# Altium PCB UCN LV.PcbDoc
Units mm, origin at the board's own origin, x right, y up, seen from the top; angles counter-clockwise.
Board outline 13.5 x 27.6 mm, 2 copper layers (Top Layer, Bottom Layer), stack 1.6 mm thick; 28 components, 33 nets, 114 pads, 84 vias.
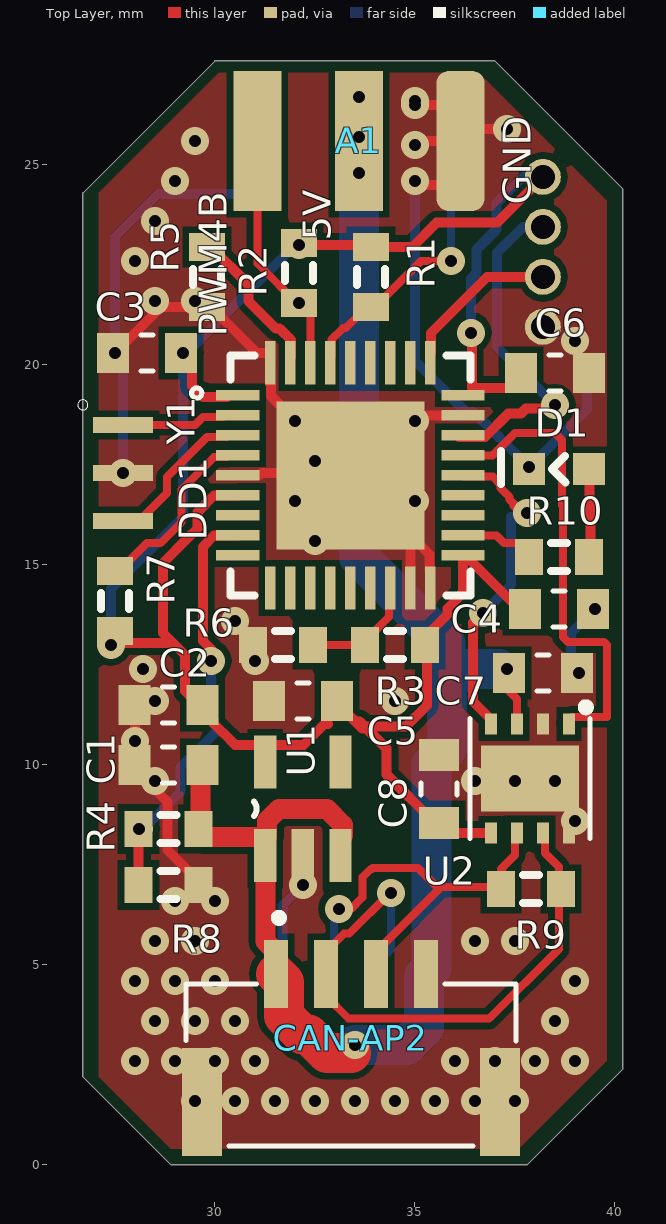
[diagram p0: Top Layer view]
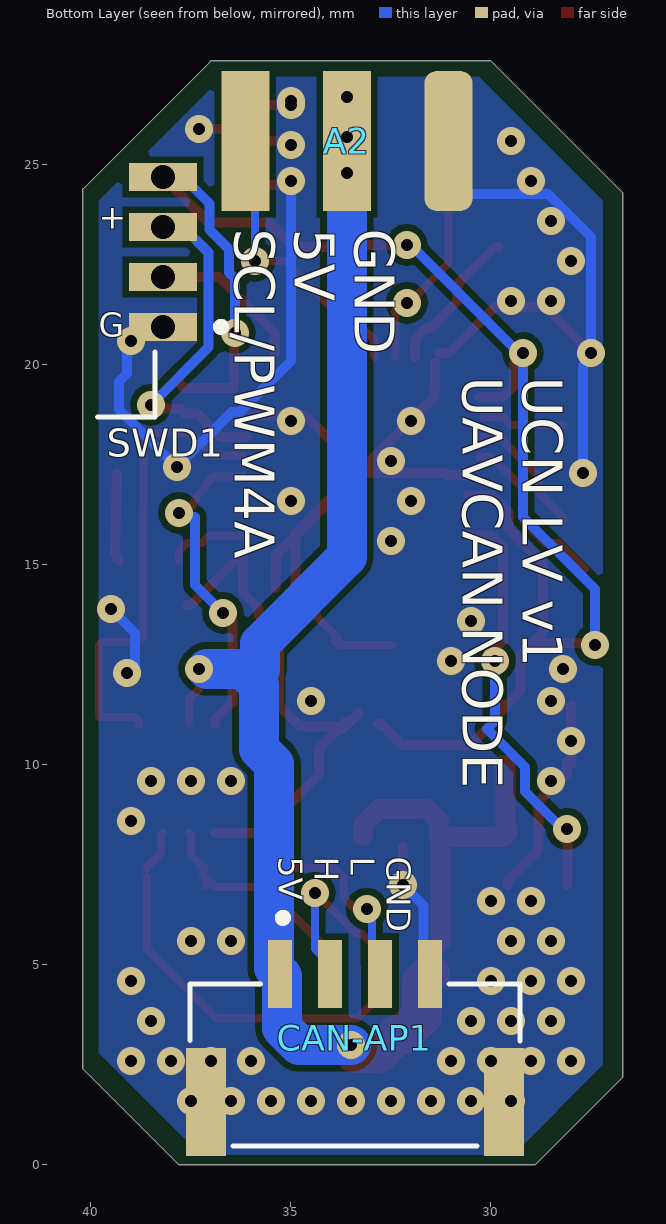
[diagram p1: Bottom Layer view, seen from below]
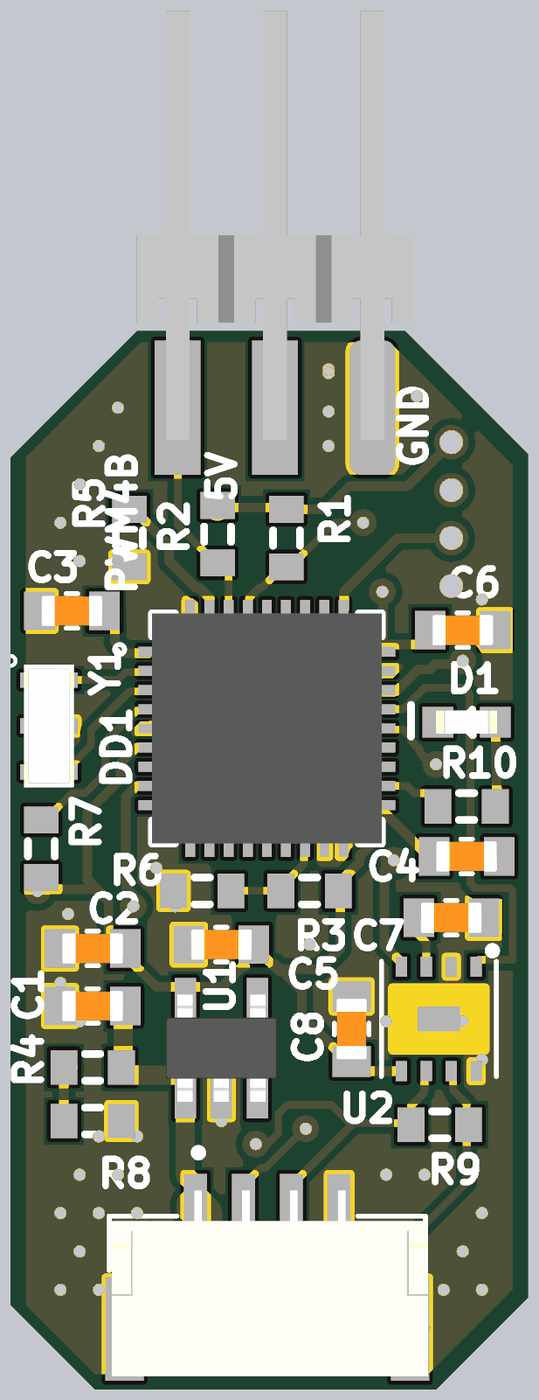
[diagram p2: 3D render of the assembled board from above, using the file's embedded part models]

## Layer stack, top to bottom
Top Solder: solder mask 0.0102, Solder Resist, Dk 3.5
Top Layer: signal copper 0.05
Dielectric 1: dielectric 1.5, FR-4, Dk 4.8
Bottom Layer: signal copper 0.05
Bottom Solder: solder mask 0.0102, Solder Resist, Dk 3.5

## Board outline
26.7,2.2 28.9,0 37.8,0 40.2,2.4 40.2,24.4 37,27.6 30,27.6 26.7,24.3

## Design rules (kind name [scope] priority, off if disabled: settings)
BoardOutlineClearance [All] p1: gap=0.25 ignorepadtopadclearanceinfootprint=FALSE
Clearance [All] p1: gap=0.17 ignorepadtopadclearanceinfootprint=FALSE
ComponentClearance [All] p1: gap=0.254 collisioncheckmode=3 verticalgap=2540 showdistances=FALSE
FanoutControl Fanout_SOIC [IsSOIC] p3: bgadir=Out bgaviamode=Closest fanoutstyle=Auto fanoutdirection=Alternating viagrid=0.025 // Fanout_SOIC (Default Rule)
FanoutControl Fanout_Small [(CompPinCount < 5)] p4: bgadir=Out bgaviamode=Closest fanoutstyle=Auto fanoutdirection=OutThenIn viagrid=0.025 // Fanout_Small (Default Rule)
FanoutControl Fanout_Default [All] p5: bgadir=In bgaviamode=Closest fanoutstyle=Auto fanoutdirection=Alternating viagrid=0.025 // Fanout_Default (Default Rule)
HoleSize [All] p1: absolutevalues=TRUE maxlimit=4.5 minlimit=0.3 maxpercent=80.000 minpercent=20.000
HoleToHoleClearance [All] p1: gap=0.4 allowstackedmicrovias=TRUE
MinimumSolderMaskSliver [All] p1: minsoldermaskwidth=0.15
PlaneClearance [All] p1: clearance=0.2
PlaneConnect [All] p1: planeconnectstyle=Relief reliefexpansion=0.5 reliefentries=4 reliefconductorwidth=0.2 reliefairgap=0.25
PolygonConnect PolygonConnect_1 [InNet('GND')] p1: connectstyle=Direct reliefconductorwidth=0.254 reliefentries=4 polygonreliefangle="90 Angle" airgapwidth=0.254
PolygonConnect [All] p2: connectstyle=Relief reliefconductorwidth=0.3 reliefentries=4 polygonreliefangle="90 Angle" airgapwidth=0.16
RoutingCorners [All] p1: cornerstyle=45-Degree minsetback=2.5 maxsetback=2.5
RoutingPriority [All] p1 off: routingpriority=0
RoutingVias [All] p1: holewidth=0.3 width=0.7 viastyle="Through Hole" minholewidth=0.3 minwidth=0.7 maxholewidth=0.8 maxwidth=1.2
SilkToSilkClearance [All] p1: silktosilkclearance=0
SilkToSolderMaskClearance [IsPad] p1: minsilkscreentomaskgap=0 clearancetoexposedcopper=TRUE
SolderMaskExpansion [All] p1: expansion=0.1
Width [All] p1: maxlimit=5 minlimit=0.17 preferedwidth=0.3
17 further rules are at their usual default settings.

## Classes and differential pairs
component class "UCN LV": A1 A2 CAN-AP1 CAN-AP2
component class STM32F103T8: C1 C2 C3 C4 C5 C6 C7 C8 D1 DD1 R1 R2 R3 R4 R5 R6 R7 R8 R9 R10 SWD1 U1 U2 Y1

## Components (designator, comment, footprint, x,y, rotation, side; value= is the part's Value field where it differs from the comment)
A1 "A" "HDR Side 3 pin" 33.6,25.6 r180 top
A2 "A" "HDR Side 3 pin" 33.6,25.6 r0 bottom
C1 "GX035C104MAT2-500" *CAPC1608X90 28.84,10 r180 top value=0.1u
C2 "GX035C104MAT2-500" *CAPC1608X90 28.84,11.5 r180 top value=0.1u
C3 "GX035C104MAT2-500" *CAPC1608X90 28.3,20.3 r180 top value=0.1u
C4 "GX035C104MAT2-500" *CAPC1608X90 38.6,13.9 r0 top value=0.1u
C5 "GX035C104MAT2-500" *CAPC1608X90 32.2,11.6 r180 top value=0.1u
C6 "GX035C104MAT2-500" *CAPC1608X90 38.5,19.8 r0 top value=0.1u
C7 "GX035C104MAT2-500" *CAPC1608X90 38.2,12.3 r0 top value=0.1u
C8 "GX035C104MAT2-500" *CAPC1608X90 35.6,9.4 r90 top value=0.1u
CAN-AP1 "SM04B-GHS-TB(LF)(SN)-" JST_SM04B-GHS-TB(LF)(SN)- 33.4,2.5 r180 bottom
CAN-AP2 "SM04B-GHS-TB(LF)(SN)-" JST_SM04B-GHS-TB(LF)(SN)- 33.4,2.5 r0 top
D1 "0603-LED-BLUE" *LEDM1608X80_LTE-C1906R-14(Primary) 38.6,17.4 r0 top
DD1 "STM32F103T8" *QFN50P600X600X100-37N 33.387,17.237 r0 top
R1 "Res3" J1-0603 33.9,22.2 r90 top value=4.7k
R2 "Res3" J1-0603 32.1,22.3 r90 top value=4.7k
R3 "RC0603FR-0710KL" J1-0603 34.5,13 r0 top value=10k
R4 "RC0603FR-0710KL" J1-0603 28.84,8.4 r0 top value=10k
R5 "RC0603FR-0710KL" J1-0603 29.8,22.2 r90 top value=10k
R6 "RC0603FR-0710KL" J1-0603 31.7,13 r0 top value=10k
R7 "RC0603FR-0710KL" J1-0603 27.5,14.1 r90 top value=10k
R8 "RC0603FR-0710KL" J1-0603 28.84,7 r180 top value=10k
R9 "Res3" J1-0603 37.9,6.9 r0 top value=120
R10 "Res3" J1-0603 38.6,15.2 r0 top value=330
SWD1 "BM04B-GHS-TBT(LF)(SN)(N)" JST_BM04B-GHS-holes 41.55,22.825 r270 bottom
U1 "SPX3819M5-L-3-3/TR" *SOT95P280X145-5N 32.2,8.9 r90 top value=3V3
U2 "TJA1042" SOT782-1 37.875,9.663 r180 top
Y1 "CSTCE8M00G55-R0" *OSC_CSTCE8M00G55-R0 27.7,17.3 r270 top

## Footprints (in the part's own frame and the unit in brackets; to place one, negate y for a bottom-side part, rotate by r counter-clockwise, add the part's x,y. Pads: shape width x height; smd on the part's side, far side on the other; paste and mask are expansions set on the pad)
*CAPC1608X90 [mm]
  rect 0.8x1 smd: 1(-0.85,0) 2(0.85,0)
  silkscreen extent -0.15,-0.45 0.15,0.45, body extent -0.8,-0.4 0.8,0.41, height 0.88
*LEDM1608X80_LTE-C1906R-14(Primary) [mm]
  rect 0.8x0.8 smd: A(0.75,0) C(-0.75,0)
  silkscreen extent -1.45,-0.38 0.16,0.45, body extent -0.8,-0.3 0.8,0.3, height 1.15
*OSC_CSTCE8M00G55-R0 [mm]
  rect 0.4x1.5 smd: 1(-1.2,0) 2(0,0) 3(1.2,0)
  silkscreen extent -1.83,-1.13 -1.57,-0.87, body extent -1.6,-0.65 1.6,0.65, height 1
*QFN50P600X600X100-37N [mm]
  rect 1.08x0.26 smd: 1(-2.815,2) 2(-2.815,1.5) 3(-2.815,1) 4(-2.815,0.5) 5(-2.815,0) 6(-2.815,-0.5) 7(-2.815,-1) 8(-2.815,-1.5) 9(-2.815,-2) 19(2.815,-2) 20(2.815,-1.5) 21(2.815,-1) 22(2.815,-0.5) 23(2.815,0) 24(2.815,0.5) 25(2.815,1) 26(2.815,1.5) 27(2.815,2)
  rect 0.26x1.08 smd: 10(-2,-2.815) 11(-1.5,-2.815) 12(-1,-2.815) 13(-0.5,-2.815) 14(0,-2.815) 15(0.5,-2.815) 16(1,-2.815) 17(1.5,-2.815) 18(2,-2.815) 28(2,2.815) 29(1.5,2.815) 30(1,2.815) 31(0.5,2.815) 32(0,2.815) 33(-0.5,2.815) 34(-1,2.815) 35(-1.5,2.815) 36(-2,2.815)
  rect 3.7x3.7 smd: 37(0,0)
  silkscreen extent -3.97,-3 3,3, body extent -3,-3 3,3, height 1
*SOT95P280X145-5N [mil]
  rect 52x22 smd: 1(-46,37) 2(-46,0) 3(-46,-37) 4(46,-37) 5(46,37)
  silkscreen extent -7,46 7,48, body extent -55,-57 55,57, height 57
"HDR Side 3 pin" [mm]
  rrect50% 1.2x3.5 smd: 1(-2.54,0)
  rect 1.2x3.5 smd: 2(0,0) 3(2.54,0)
  body extent -3.61,-10.34 3.61,0.83, height 1.67
J1-0603 [mm] "Chip Resistor, Body 1.6x0.8mm, IPC High Density"
  rect 0.7x0.9 smd: 1(-0.75,0) 2(0.75,0)
  silkscreen extent -0.2,-0.35 0.2,0.35, body extent -0.85,-0.48 0.85,0.48, height 0.9
JST_BM04B-GHS-holes [mm]
  rect 0.7x1.7 / inner rect 0.6x1.7 / far side round 0.9 hole 0.6: 1(1.875,3.35) 2(0.625,3.35) 3(-0.625,3.35) 4(-1.875,3.35)
  silkscreen extent 1.78,1.72 4.13,4.9
JST_SM04B-GHS-TB(LF)(SN)- [mm]
  rect 0.6x1.7 smd: 1(-1.875,2.275) 2(-0.625,2.275) 3(0.625,2.275) 4(1.875,2.275)
  rect 1x2.7 smd: SH1(-3.725,-0.925) SH2(3.725,-0.925)
  silkscreen extent -4.13,-2.02 4.13,3.77, body extent -4.06,-2.16 4.19,2.69, height 4.35
SOT782-1 [mm]
  rect 0.3x0.525 smd: 1(-0.975,-1.362) 2(-0.325,-1.362) 3(0.325,-1.362) 4(0.975,-1.362) 5(0.975,1.362) 6(0.325,1.362) 7(-0.325,1.362) 8(-0.975,1.362)
  rect 2.45x1.65 smd paste-2: P$9(0,0)
  silkscreen extent -1.5,-1.88 1.5,1.5, body extent -1.52,-1.52 1.52,1.52, height 0.85

## Part data
A1 A2: library part "Header 3", "Header, 4-Pin", ChipDip_Link=https://www.chipdip.ru/product/pls-3, HelpURL=https://static.chipdip.ru/lib/227/DOC000227157.pdf, MF="Connfly electronic (Zhenqin)", MP="PLS-3 (DS1021-1x3)", System=Connector, Type=SMD
C1 C2 C3 C4 C5 C6 C7 C8: "Cap Thin Film 0.1uf 50v 0603", Package="0603 AVX", MF=AVX, Pacage Metric=1608, SnapEDA_Link=https://www.snapeda.com/parts/GX035C104MAT2-500/AVX/view-part/?ref=snap, Type=SMD
  C1 C2: MP=GX035C104MAT2-500
  C3 C4 C5 C6 C7 C8: MP="GX035C104MAT2-500 or CL10B104JB8NNNC"
CAN-AP1 CAN-AP2: "Connector Header Surface Mount, Right Angle 4 position 0.049 _1.25mm_", Package=None, ChipDip_Link=https://www.chipdip.ru/product/sm04b-ghs-tb-lf-sn-gh-1.25mm-header-side-ent, HelpURL=http://www.farnell.com/datasheets/2082975.pdf, MF="JST Sales", MP=SM04B-GHS-TB(LF)(SN), SnapEDA_Link=https://www.snapeda.com/parts/SM04B-GHS-TB%28LF%29%28SN%29-/JST%20Sales%20America%20Inc./view-part/2759740/?ref=snap, System=Connector
D1: library part LTE-C1906R-14, "LED IrLED Chip LED 2-Pin SMD T/R", Package="0603 Lite-On", MP=0603-LED-BLUE, SnapEDA_Link=https://www.snapeda.com/parts/LTE-C1906R-14/Lite-On%20Inc./view-part/?ref=snap, Type=SMD
DD1: "STM32F103T8U6, Микроконтроллер 32BIT ARM 64K FLASH [VFQFPN-36]", Package=VFQFPN-36, ChipDip_Link=https://www.chipdip.ru/product/stm32f103t8u6-2, HelpURL=http://www.st.com/stonline/products/literature/ds/13587.pdf, MF=STM, MP=STM32F103T8U6, SnapEDA_Link=https://www.snapeda.com/parts/STM32F103T8U6TR/STMicroelectronics/view-part/?ref=search&t=STM32F103T8U6, Type=SMD
R1 R2 R10: "Resistor", Package=R0603, Pacage Metric=1608, Type=SMD
  R1 R2: ChipDip_Link=https://www.chipdip.ru/product0/9000079736, HelpURL=https://www.chipdip.ru/product0/9000079736, MP="4.7K 1% 0603"
  R10: ChipDip_Link=https://www.chipdip.ru/product0/9000079628, HelpURL=https://www.chipdip.ru/product0/9000079628, MP=RC0603FR-07330RL
R3 R4 R5 R6 R7 R8: "10 kOhms 1 0.1 W 1 10 W Chip Resistor 0603 1608 Metric Thick Film", Package=R0603, ChipDip_Link=https://www.chipdip.ru/product0/9000079736, HelpURL=https://www.chipdip.ru/product0/9000079736, MF="Yageo or NXP", MP="10K 1% 0603", Pacage Metric=1608, SnapEDA_Link=https://www.snapeda.com/parts/RC0603FR-0710KL/Yageo/view-part/?ref=dk&t=RC0603FR-0710KL&con_ref=None, Type=SMD
R9: "120 Ohms 1 0.1 W 1 10 W Chip Resistor 0603 1608 Metric Thick Film", Package=R0603, ChipDip_Link=https://www.chipdip.ru/product0/9000079618, HelpURL=https://www.chipdip.ru/product0/9000079618, MP=RC0603FR-07120RL, Pacage Metric=1608, Type=SMD
SWD1: "Conn Shrouded Header HDR 4 POS 1.25mm Solder ST SMD Reel", Package=None, Instructions="Do not install", MF="JST Sales", MP=SM04B-GHS-TB(LF)(SN), SnapEDA_Link=https://www.snapeda.com/parts/BM04B-GHS-TBT%28LF%29%28SN%29%28N%29/JST%20Sales%20America%20Inc./view-part/?ref=snap, System=Connector, Type=SMD
U1: library part SPX3819M5-L, "Low Dropout Voltage Regulator, Adjustable 0.5A, ±1%, 2.5 to 16 Vin, 5-Pin SOT-23", Package="SOT-23-5 Exar", ChipDip_Link=https://www.chipdip.ru/product1/8003455237, HelpURL=http://www.farnell.com/datasheets/2614478.pdf, MF="MaxLinear, Inc.", MP=SPX3819M5-L-3-3/TR, SnapEDA_Link=https://www.snapeda.com/parts/SPX3819M5-L/MaxLinear%2C%20Inc./view-part/?ref=snap, Type=SMD
U2: "1/1 Transceiver Half CANbus 8-SO", Package="VDFN-8 NXP USA", ChipDip_Link=https://www.chipdip.ru/product1/8002840332, HelpURL=https://static.chipdip.ru/lib/583/DOC001583059.pdf, MF="NXP USA", MP=TJA1042, SnapEDA_Link=https://www.snapeda.com/parts/TJA1042/NXP%20USA%20Inc./view-part/900919/?ref=snap, Type=SMD
Y1: "Ceramic Resonator 8MHz ??0.5% _Tol_ ??0.2% _Stability_ 33pF 40Ohm 3-Pin CSMD T/R", Package="SMD-3 Murata", ChipDip_Link=https://www.chipdip.ru/product1/8001783721, HelpURL=https://www.murata.com/en-eu/api/pdfdownloadapi?cate=&partno=CSTCE8M00G55-R0, MF=Murata, MP=CSTCE8M00G55-R0, SnapEDA_Link=https://www.snapeda.com/parts/CSTCE8M00G55-R0/Murata%20Electronics%20North%20America/view-part/?ref=snap, Type=SMD

## Via types
v1: diameter 0.7, hole 0.3, Top Layer to Bottom Layer, tented both sides, 84 vias

## Nets (pads, with @x,y where several pads share a name; then routed paths per layer and width w, separated by ;. In a path a pad name is that pad's centre, name@x,y a point inside that pad or via, vN(x,y) a via of type N, cw(c..) or ccw(c..) an arc to the next point about the centre after c; other vN are vias at no path point)
3.3: C2.1 C3.1 C4.1 C5.1 C6.1 C8.1 DD1.1 DD1.6 DD1.19 DD1.27 R1.2 R2.2 R3.2 R7.1 SWD1.4 U1.5 U2.5 | length 53.5
  Top Layer w0.25: R7.1@27.4,13.045 28.955,13.045 ; C3.1@29.425,20.025 29.425,19.475 29.7,19.2 DD1.1@30.3,19.2 ; C2.1@29.6,11.5 29.255,11.845 29.255,12.745 28.955,13.045 ; C2.1 29.69,11.4 29.965,11.125 29.965,11.035 30.205,10.795 30.212,10.795 30.507,10.5 32.214,10.5 32.738,11.024 32.824,11.024 ; DD1.6 30.568,16.732 29.98,16.732 29.565,16.317 29.565,15.911 29.317,15.663 28.7,15.046 28.7,13.3 28.955,13.045 ; v1(32.1,23) R2.2 32.15,23 R1.2@34,23 ; C5.1@33.3,11.3 33.561,11.039 33.695,10.905 33.695,11.005 ; 33.611,11.089 33.695,11.005 ; R1.2 34.938,22.95 35.543,23.555 37.055,23.555 38.1,24.6 SWD1.4@38.3,24.6 ; C8.1@35.45,8.6 34.295,9.755 34.295,10.405 33.745,10.955 ; C8.1@35.6,8.5 35.8,8.3 U2.5 ; v1(36.4,20.8) 36.425,20.775 36.425,19.425 37.675,19.425 C6.1@37.75,19.5 ; C4.1@37.6,14 37.5,14 37.375,14.125 36.263,15.237 DD1.19 36.203,14.302 35.813,13.912 35.813,13.76 35.3,13.247 35.3,12.9 35.3,11.488 34.767,10.955 33.745,10.955 ; 33.695,11.005 33.745,10.955
  Bottom Layer w0.25: v1(27.4,13) 27.4,14.4 29.2,16.2 v1(29.2,20.3) ; v1@29.397,20.397 32,23 v1(32.1,23) ; v1(36.4,20.8) 36.4,22.161 36.545,22.306 36.545,22.889 37.035,23.379 37.035,24.035 37.8,24.8 SWD1.4@38.3,24.8
5V: A1.2 A2.2 C1.1 C7.1 CAN-AP1.1 CAN-AP2.1 R4.2 U1.1 U1.3 U2.3 | length 41.1
  Top Layer w0.2: C7.1@37.3,12.2 37.3,11.9 37.55,11.65 U2.3
  Top Layer w0.5: R4.2 29.59,8.3 29.69,8.2 31.3,8.2 31.3,8.597 31.603,8.9 32.797,8.9 ; R4.2@29.6,8.3 29.64,8.34 29.64,9.95 C1.1 ; U1.1@31.26,7.963 31.26,5.59 31.5,5.35 CAN-AP2.1@31.5,4.7 ; 32.8,8.9 32.797,8.9 ; U1.3@33.2,8.234 33.2,8.497 32.797,8.9
  Top Layer w1: CAN-AP2.1 31.725,4.575 31.725,3.727 32.197,3.255 32.345,3.255 32.8,2.8 v1@33.4,2.8
  Bottom Layer w1: v1(33.5,3) 34.8,3 35.225,3.425 35.225,4.725 CAN-AP1.1 35.42,4.92 35.42,10.02 35.8,10.4 35.8,12 36.2,12.4 ; A2.2 v1(33.6,25.7) ; A2.2@33.65,25.55 33.6,25.5 v1(33.6,24.8) 33.6,15.2 35.77,13.03 35.77,12.4 36.2,12.4 ; v1@37.1,12.4 36.2,12.4
  other v1: 37.3,12.4 33.6,26.7
ADC_5V: DD1.8 R4.1 R8.2 | length 10.5
  Top Layer w0.25: R4.1 28.09,7.01 R8.2@28.1,7 ; v1(29.9,12.6) 29.9,12.9 29.7,13.1 29.7,15.452 29.98,15.732 30.568,15.732 DD1.8
  Bottom Layer w0.25: v1(28.1,8.4) 28.212,8.4 29.145,9.333 29.145,9.945 30.1,10.9 29.9,11.1 v1(29.9,12.6)
ADC_CUR: DD1.10
ADC_VIN: DD1.7
BOOT0: DD1.35 R5.2 | length 3.7
  Top Layer w0.25: R5.2 29.9,22.95 30.835,22.015 30.835,21.597 31.528,20.905 31.622,20.905 31.9,20.627 DD1.35@31.9,20.2
CAN_H: CAN-AP1.2 CAN-AP2.2 R9.2 U2.7 | length 14.8
  Top Layer w0.2: v1(34.4,6.8) 34.377,6.8 33.357,5.78 33.23,5.78 32.775,5.325 32.775,4.225 33.345,3.655 36.855,3.655 38.6,5.4 R9.2@38.6,7.2 ; U2.7 38.25,8.25 38.25,7.8 38.6,7.45 38.6,7.4
  Bottom Layer w0.2: CAN-AP1.2@34.1,5.1 34.4,5.4 v1(34.4,6.8)
CAN_L: CAN-AP1.3 CAN-AP2.3 R9.1 U2.6 | length 10.9
  Top Layer w0.2: v1(33.1,6.4) 33.4,6.4 33.689,6.689 33.689,7.191 33.9,7.402 33.925,7.402 33.943,7.42 35.08,7.42 35.6,6.9 ; CAN-AP2.3 34.025,5.325 35.6,6.9 ; R9.1@37.1,7 R9.1@37.15,7 ; 37.15,7.4 37.5,7.75 37.5,8.25 U2.6 ; R9.1@37.2,7.3 37.2,7.25 36.9,6.95 35.65,6.95 35.6,6.9
  Bottom Layer w0.2: CAN-AP1.3 32.975,4.975 32.975,6.075 33.004,6.104 33.004,6.304 v1(33.1,6.4)
CAN_RXD: DD1.23 U2.4 | length 8.3
  Top Layer w0.2: DD1.23 36.233,17.207 36.948,17.207 37.143,17.012 37.143,16.925 37.368,16.7 37.368,16.632 37.5,16.5
  Top Layer w0.25: v1(36.7,13.8) 36.455,13.555 36.455,11.583 36.9,11.138 U2.4 ; 37.489,16.489 37.678,16.3 v1(37.8,16.3)
  Bottom Layer w0.25: v1(36.7,13.8) 37.4,14.5 37.4,16.2 37.7,16.2 v1(37.8,16.3)
CAN_TXD: DD1.24 U2.1 | length 11.8
  Top Layer w0.2: DD1.24 36.937,17.737 37.5,18.3 38.5,18.3 38.68,18.12 38.68,16.488 38.7,16.468 38.7,13.2 38.83,13.07 39.73,13.07 39.8,13 39.8,11.2 38.912,11.2 38.8,11.088 U2.1@38.8,11
GND: A1.1 A2.1 C1.2 C2.2 C3.2 C4.2 C5.2 C6.2 C7.2 C8.2 CAN-AP1.4 CAN-AP1.SH1 CAN-AP1.SH2 CAN-AP2.4 CAN-AP2.SH1 CAN-AP2.SH2 D1.C DD1.5 DD1.17 DD1.18 DD1.26 DD1.36 DD1.37 R5.1 R6.1 R8.1 SWD1.1 U1.2 U2.2 U2.8 U2.P$9 Y1.2 | length 61.4
  Top Layer w0.25: v1(27.5,20.3) 28.65,21.45 R5.1 29.9,21.45 31.05,20.3 DD1.36@31.3,20.3 ; C2.2 28,11.49 C1.2@28,10 ; C1.2@28.1,10.1 28.1,9.79 28.815,9.075 28.815,7.875 29.59,7.1 R8.1 ; DD1.5 30.577,17.242 31.104,17.242 31.163,17.3 DD1.37@33,17.3 ; DD1.36 31.392,20.047 31.392,19.504 31.408,19.489 31.408,19.217 33,17.625 DD1.37@33,17.3 ; v1(32.2,7) U1.2@32.2,7.963 ; DD1.37@33.1,17.3 DD1.37@33,17.3 ; DD1.37@33.2,17.3 34.637,18.737 DD1.26 ; DD1.37@33.425,17.275 DD1.37@33.5,17.2 ; DD1.37@33.5,17.3 DD1.37@33.5,17.2 ; DD1.17 DD1.37@34.887,15.737 ; v1@35,24.5 35.678,24.5 36.14,24.962 A1.1 ; v1(35,25.5) 35.1,25.6 A1.1 ; v1(35,26.5) 35.678,26.5 36.14,26.038 A1.1 ; DD1.18 35.388,14.832 35.367,14.852 35.367,15.257 DD1.37@34.887,15.737 ; v1(37.3,25.9) 36.44,25.9 A1.1 ; D1.C v1(37.85,17.45) ; C7.2 v1(39.1,12.3) ; DD1.37@33.5,17.2 34.887,15.813 DD1.37@34.887,15.737 ; DD1.37@33.5,17.2 33.5,17.125 DD1.37@34.887,15.737
  Bottom Layer w0.25: v1(27.5,20.3) 27.5,23.2 28.575,24.275 30.598,24.275 31.06,24.737 A2.1 ; v1@27.6,20.3 27.586,20.286 27.586,20.092 27.7,19.978 v1(27.7,17.3) ; CAN-AP1.4@31.5,4.9 31.687,5.087 31.687,6.487 v1(32.2,7) ; v1@35,24.5 35,20.1 36.282,18.818 36.482,18.818 v1@37.8,17.5 ; v1(37.85,17.45) 37.862,17.45 39.3,18.888 39.3,19.583 39.1,19.783 v1@39.1,20.7 ; v1@38.9,12.3 38.9,13.3 v1(39.5,13.9)
  other v1: 29.5,1.6 30.5,1.6 31.5,1.6 32.5,1.6 33.5,1.6 34.5,1.6 35.5,1.6 36.5,1.6 37.5,1.6 28,2.6 29,2.6 30,2.6 31,2.6 36,2.6 37,2.6 38,2.6 39,2.6 28.5,3.6 29.5,3.6 30.5,3.6 38.5,3.6 28,4.6 29,4.6 30,4.6 39,4.6 28.5,5.6 29.5,5.6 36.5,5.6 37.5,5.6 29,6.6 30,6.6 39,8.6 28.5,9.6 36.5,9.6 37.5,9.6 38.5,9.6 28,10.6 28.5,11.6 34.5,11.6 28.2,12.4 31,12.6 30.5,13.6 32.5,15.6 32,16.6 35,16.6 32.5,17.6 32,18.6 35,18.6 39,20.6 28.5,21.6 29.5,21.6 28,22.6 28.5,23.6 29,24.6 35,24.6 29.5,25.6 35,26.6
LED: DD1.20 R10.1 | length 2
  Top Layer w0.2: DD1.20 37.043,15.737 37.229,15.55 37.6,15.55 37.8,15.35 R10.1@37.8,15.1
MISO/ADC_VC: DD1.13
MOSI/ADC_MID: DD1.14
NetD1_A: D1.A R10.2 | length 2.1
  Top Layer w0.25: R10.2@39.3,15.1 39.35,15.15 R10.2 ; D1.A@39.35,17.3 R10.2@39.4,15.3
NSS/ADC_VA: DD1.11
OSC_IN: DD1.2 Y1.1 | length 2.1
  Top Layer w0.2: Y1.1@28.2,18.5 29.5,18.5 29.7,18.7 DD1.2@30.2,18.7
OSC_OUT: DD1.3 Y1.3 | length 3.3
  Top Layer w0.2: Y1.3@28.2,16.1 28.2,16.2 28.8,16.8 28.8,17.2 29.8,18.2 DD1.3@30.3,18.2
PWM2A: DD1.29
PWM2B: DD1.30
PWM2C: DD1.9
PWM3A: DD1.31
PWM3B: DD1.32
PWM3C: DD1.15
RX: DD1.22
SCK/ADC_VB: DD1.12
SCL/PWM4A: A2.3 DD1.33 R1.1 | length 6.6
  Top Layer w0.2: DD1.33@32.9,20.2 32.918,20.218 32.918,20.634 33.201,20.917 33.267,20.917 33.8,21.45 34,21.45 35.15,22.6 v1(35.9,22.6)
  Bottom Layer w0.2: v1(35.9,22.6) 35.9,24.7 A2.3@36.1,24.9
SDA/PWM4B: A1.3 DD1.34 R2.1 | length 5.7
  Top Layer w0.2: A1.3 31.06,22.54 R2.1@32.1,21.5 ; DD1.34@32.4,20.2 32.387,20.213 32.387,21.338 R2.1@32.4,21.35
  other v1: 32.1,21.55
STM_NRST: DD1.4 R7.2 | length 4.3
  Top Layer w0.2: R7.2@27.65,14.9 28.3,15.55 28.646,15.55 29.17,16.074 29.17,16.886 29.984,17.7 DD1.4@30.3,17.7
SWDIO: DD1.25 SWD1.3 | length 8.5
  Top Layer w0.25: DD1.25@36.1,18.2 36.753,18.2 37.333,18.78 37.649,18.78 37.783,18.914 38.414,18.914 v1(38.5,19)
  Bottom Layer w0.25: SWD1.3 37.7,23.45 37.055,22.805 37.055,20.445 v1(38.5,19)
SWLK: DD1.28 SWD1.2 | length 3.9
  Top Layer w0.25: DD1.28@35.4,20.3 35.4,20.8 36.8,22.2 SWD1.2
TX: DD1.21
VERSION: DD1.16 R3.1 R6.2 | length 3
  Top Layer w0.2: R6.2 R3.1 33.8,13 R3.1@33.9,13.1 ; R3.1@33.825,13.175 34.358,13.708 34.358,14.392 DD1.16
pads on no net: U1.4

## Polygon pours and split planes (outlines as drawn)
GND on Bottom Layer "GND_L02_P055" (solid, remove dead copper, pour order 55): 27.2,2.5 29.5,0.2 37.2,0.2 39.8,2.8 39.8,24.1 36.7,27.2 30.3,27.2 27.2,24.1
no net on Bottom Layer "Bottom Layer-No Net 6" (solid, pour order 12): -3.65,8.875
GND on Top Layer "GND_L01_P057" (solid, remove dead copper, pour order 57): 27.1,2.2 28.9,0.4 37.6,0.4 39.8,2.6 39.8,24.1 36.6,27.3 30.1,27.3 27.1,24.3

## Silkscreen, mask and mechanical layers (free items; w line width, h text height)
Top Overlay:
  text "GND" at 37.9,24 h0.7 r90
  text "5V" at 32.9,23.1 h0.7 r90
  text "PWM4B" at 30.3,20.7 h0.7 r90
Bottom Overlay:
  text "GND / 5V / SCL/PWM4A" at 36.4,23.4 h1 r90
  text "+ /  /  / G" at 39.8,20.7 h0.6
  text "UCN LV v1 / UAVCAN NODE" at 30.7,19.7 h1 r90
  text "GND / L / H / 5V" at 35.3,7.7 h0.6 r90
Mechanical 2:
  the board outline again, w0.2